# Allegro board ACU5EV.brd
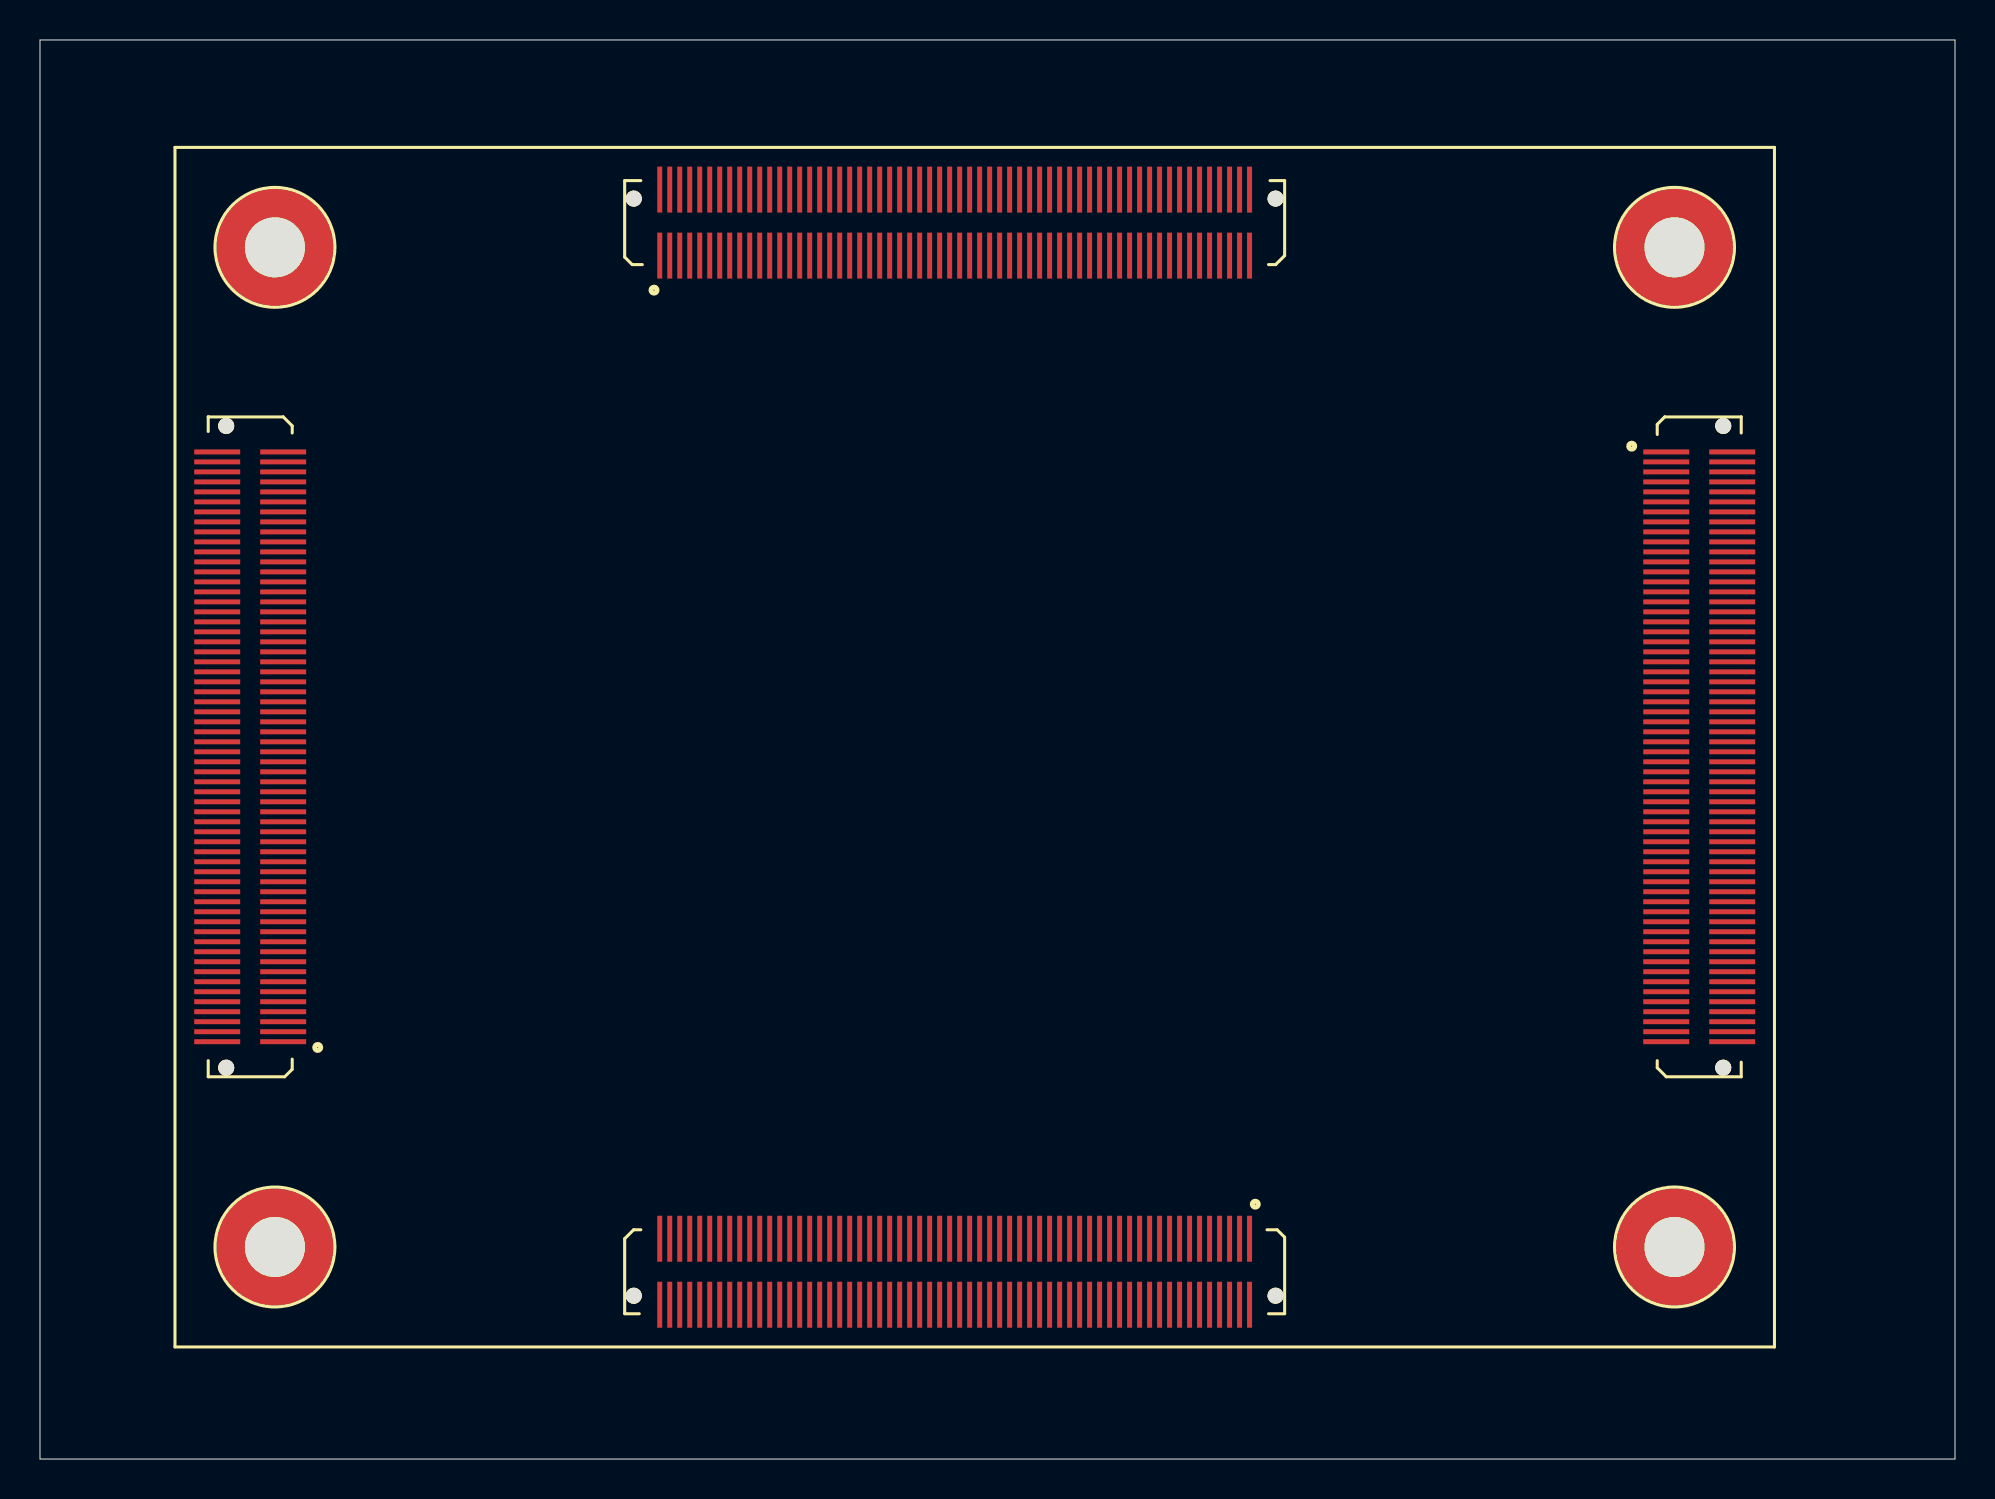
[diagram p0: board, top side]
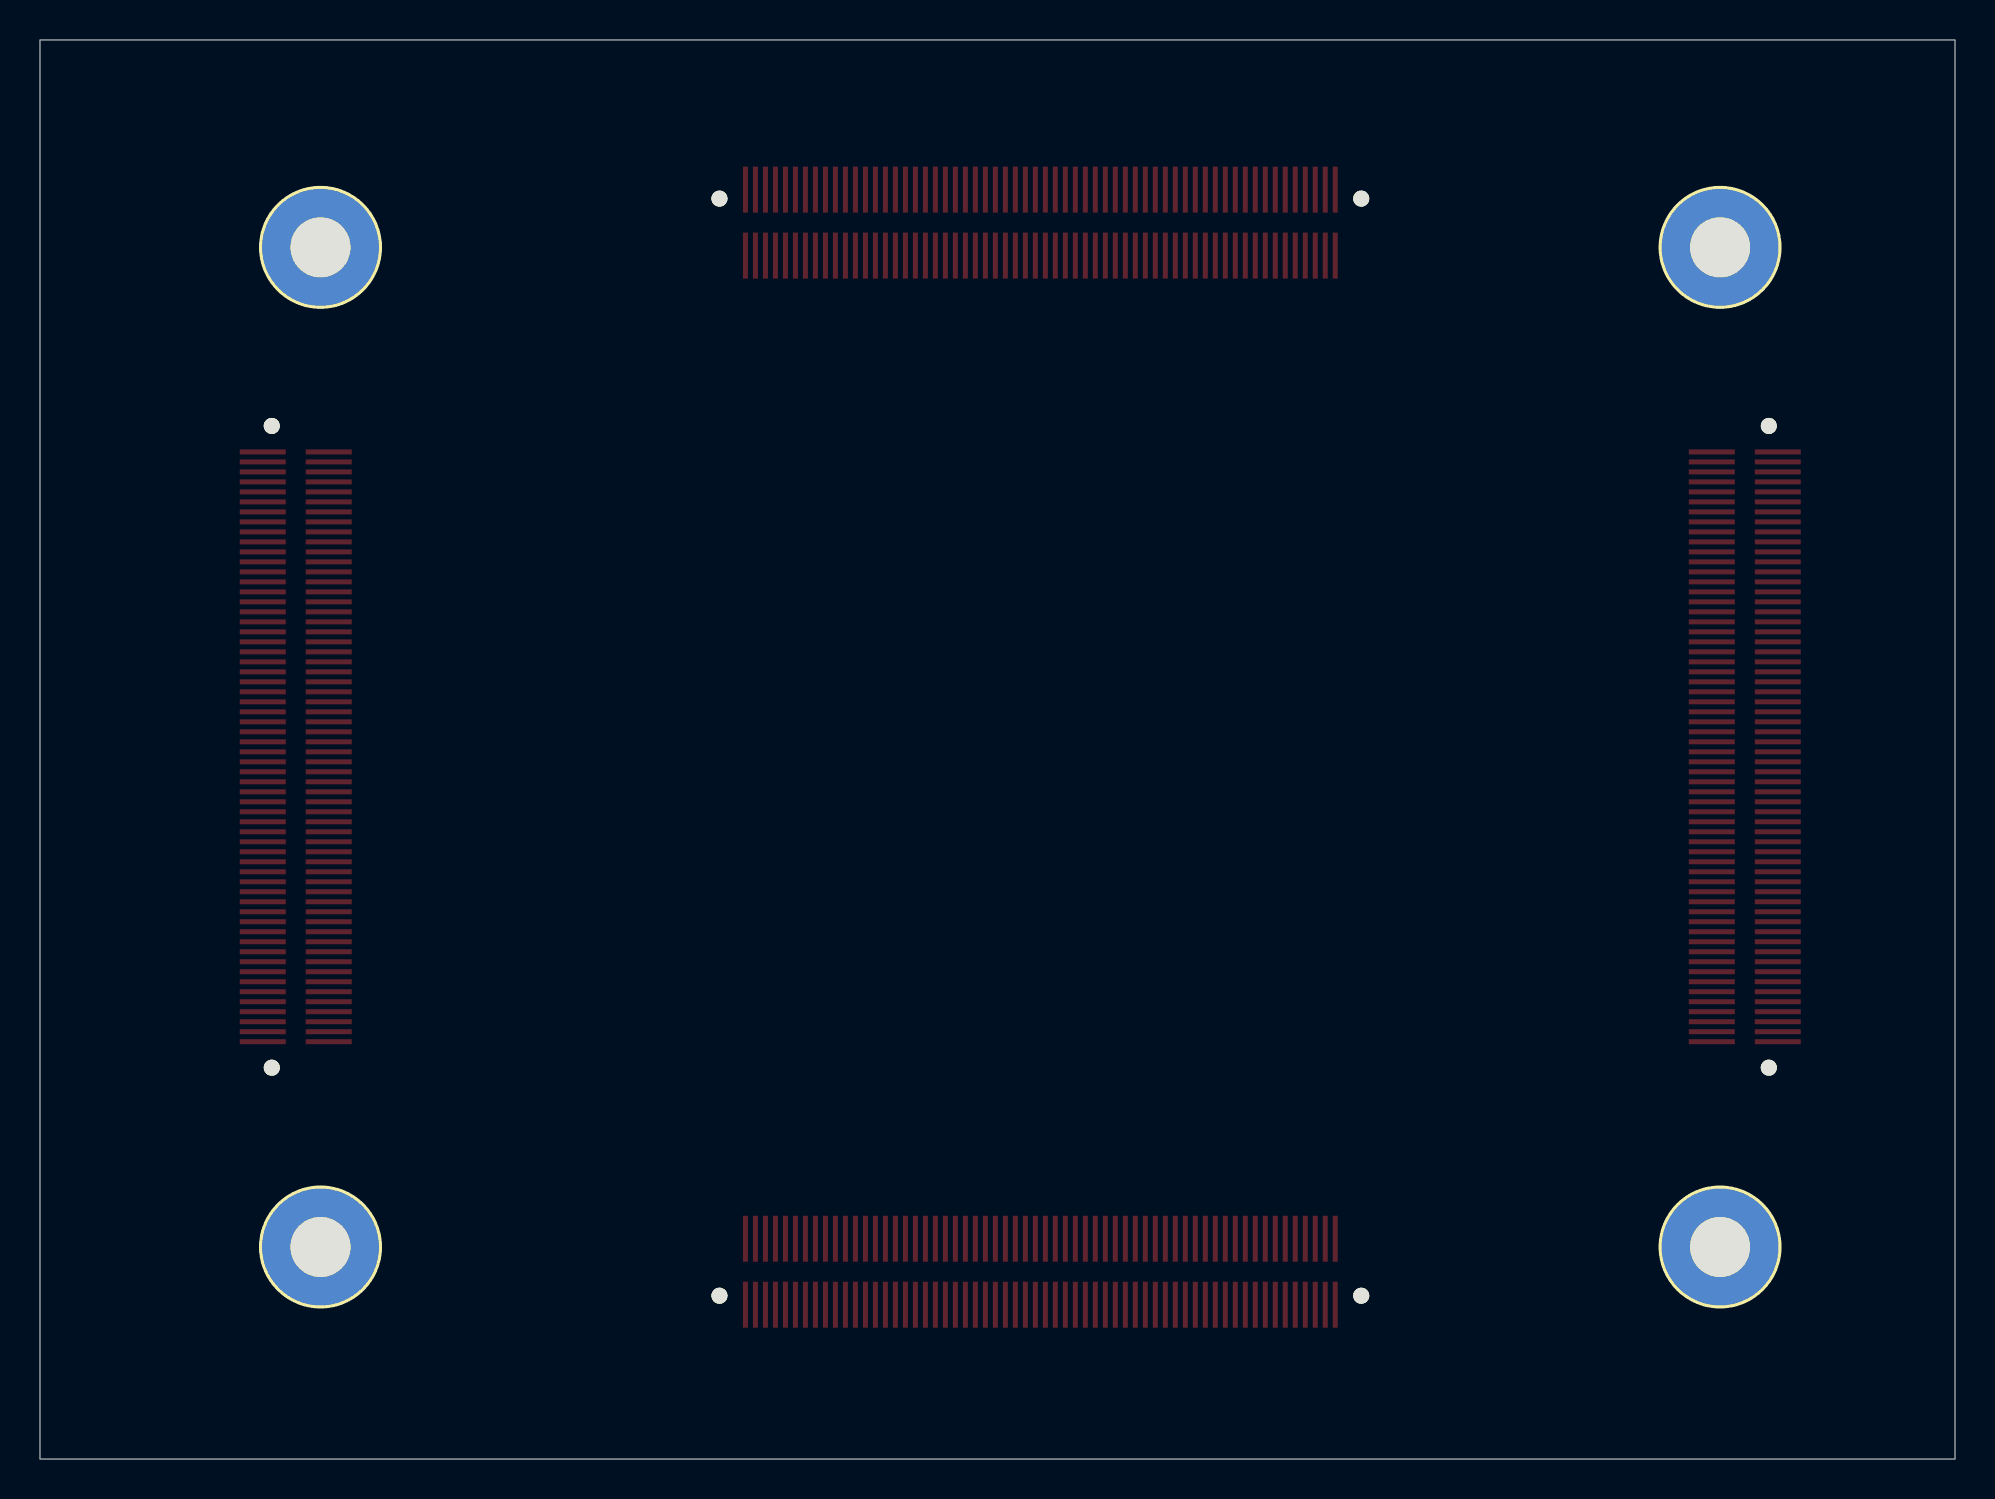
[diagram p1: board, bottom side, seen from below]

Outline 95.78 x 70.98 mm; copper layers: TOP, L2_GND, L3, L4_VCC, L5_GND, BOTTOM. Coordinates in mm from the lower left corner of the outline.
Outline path: 0,70.98 0,0 95.78,0 95.78,70.98 0,70.98

## Design rules (mm)
net group 90OHM: nets OTG_D_N OTG_D_P
net group 224_SFP_CLK: nets 224_CLK1_N 224_CLK1_P
net group 485_1: nets 485_A 485_B1
net group 485_2: nets 485_A2 485_B2
net group 505_CLK3: nets 505_CLK3_N 505_CLK3_P
net group 505_DP_CLK: nets 505_DP_CLKN 505_DP_CLKP
net group 505_PCIE_REFCLK: nets 505_PCIE_REFCLK_N 505_PCIE_REFCLK_P
net group 505_RX0: nets 505_RX2_N 505_RX2_P
net group B43_L2: nets B43_L2_N B43_L2_P
net group B43_L6: nets B43_L6_N B43_L6_P
net group B43_L7: nets B43_L7_N B43_L7_P
net group B43_L8: nets B43_L8_N B43_L8_P
net group B43_L10: nets B43_L10_N B43_L10_P
net group B43_L12: nets B43_L12_N B43_L12_P
net group B44_L1: nets B44_L1_N B44_L1_P
net group B44_L2: nets B44_L2_N B44_L2_P
net group B44_L3: nets B44_L3_N B44_L3_P
net group B44_L5: nets B44_L5_N B44_L5_P
net group B44_L6_DL: nets B44_L6_N B44_L6_P
net group B44_L7_DL: nets B44_L7_N B44_L7_P
net group B44_L8_DL: nets B44_L8_N B44_L8_P
net group B44_L9_DL: nets B44_L9_N B44_L9_P
net group B44_L10_DL: nets B44_L10_N B44_L10_P
net group B44_L11_DL: nets B44_L11_N B44_L11_P
net group B44_L12_DL: nets B44_L12_N B44_L12_P
net group B45_L4_DL: nets B45_L4_N B45_L4_P
net group B45_L5_DL: nets B45_L5_N B45_L5_P
net group B45_L6_DL: nets B45_L6_N B45_L6_P
net group B45_L9_DL: nets B45_L9_N B45_L9_P
net group B45_L11_DL: nets B45_L11_N B45_L11_P
net group B45_L12_DL: nets B45_L12_N B45_L12_P
net group B46_L1_DL: nets B46_L1_N B46_L1_P
net group B46_L2_DL: nets B46_L2_N B46_L2_P
net group B46_L3_DL: nets B46_L3_N B46_L3_P
net group B46_L4_DL: nets B46_L4_N B46_L4_P
net group B46_L5_DL: nets B46_L5_N B46_L5_P
net group B46_L6_DL: nets B46_L6_N B46_L6_P
net group B46_L7_DL: nets B46_L7_N B46_L7_P
net group B46_L9_DL: nets B46_L9_N B46_L9_P
net group B46_L10_DL: nets B46_L10_N B46_L10_P
net group B46_L11_DL: nets B46_L11_N B46_L11_P
net group B46_L12_DL: nets B46_L12_N B46_L12_P
net group B65_L5: nets B65_L5_N B65_L5_P
net group B65_L22: nets B65_L22_N B65_L22_P
net group B66_L9: nets B66_L9_N B66_L9_P
net group CAN1: nets CAN1_CANH CAN1_CANL
net group CAN2: nets CAN2_CANH CAN2_CANL
net group DPAUX_C_P: nets DPAUX_C_N DPAUX_C_P
net group DPAUX_P: nets DPAUX_N DPAUX_P
net group FMC_CLK0: nets B65_L11_N B65_L11_P
net group FMC_CLK1: nets B65_L14_N B65_L14_P
net group FMC_LA00_CC: nets B65_L12_N B65_L12_P
net group FMC_LA01_CC: nets B65_L13_N B65_L13_P
net group FMC_LA02: nets B65_L10_N B65_L10_P
net group FMC_LA05: nets B65_L6_N B65_L6_P
net group FMC_LA06: nets B65_L20_N B65_L20_P
net group FMC_LA07: nets B65_L15_N B65_L15_P
net group FMC_LA08: nets B65_L7_N B65_L7_P
net group FMC_LA09: nets B65_L9_N B65_L9_P
net group FMC_LA10: nets B65_L17_N B65_L17_P
net group FMC_LA12: nets B65_L16_N B65_L16_P
net group FMC_LA13: nets B65_L21_N B65_L21_P
net group FMC_LA14: nets B65_L19_N B65_L19_P
net group FMC_LA15: nets B65_L18_N B65_L18_P
net group FMC_LA16: nets B65_L23_N B65_L23_P
net group FMC_LA17_CC: nets B66_L11_N B66_L11_P
net group FMC_LA18_CC: nets B66_L12_N B66_L12_P
net group FMC_LA19: nets B65_L24_N B65_L24_P
net group FMC_LA20: nets B66_L5_N B66_L5_P
net group FMC_LA21: nets B66_L16_N B66_L16_P
net group FMC_LA22: nets B66_L3_N B66_L3_P
net group FMC_LA23: nets B65_L8_N B65_L8_P
net group FMC_LA24: nets B66_L2_N B66_L2_P
net group FMC_LA25: nets B66_L15_N B66_L15_P
net group FMC_LA26: nets B66_L6_N B66_L6_P
net group FMC_LA27: nets B66_L1_N B66_L1_P
net group FMC_LA28: nets B66_L7_N B66_L7_P
net group FMC_LA29: nets B66_L20_N B66_L20_P
net group FMC_LA30: nets B66_L13_N B66_L13_P
net group FMC_LA31: nets B66_L10_N B66_L10_P
net group PCIE_REFCLK_DL: nets PCIE_REFCLK_N PCIE_REFCLK_P
net group 20MIL: nets 224_RX0_N 224_RX0_P 224_RX1_N 224_RX1_P 224_RX2_N 224_RX2_P 224_RX3_N 224_RX3_P 224_TX0_N 224_TX0_P
net group 20MIL1: nets 224_CLK0_N 224_CLK0_P 224_TX1_N 224_TX1_P 224_TX2_N 224_TX2_P 224_TX3_N 224_TX3_P GT0_DP_TX_C_N GT0_DP_TX_C_P GT1_DP_TX_C_N GT1_DP_TX_C_P MIPI_CLK_N MIPI_CLK_P MIPI_LAN0_N MIPI_LAN0_P MIPI_LAN1_N MIPI_LAN1_P PCIE_TX_C_N PCIE_TX_C_P RXN_DS1 RXN_DS2 RXN_DS3 RXN_DS4 RXP_DS1 RXP_DS2 RXP_DS3 RXP_DS4 TXN_DS1 TXN_DS1_C TXN_DS2 TXN_DS3 TXN_DS3_C TXN_DS4 TXN_DS4_C TXP_DS1 TXP_DS1_C TXP_DS2 TXP_DS3 TXP_DS3_C TXP_DS4 TXP_DS4_C USB_RXN_UP USB_RXP_UP USB_TXN_UP USB_TXP_UP
net group 20MIL2: nets 505_USB_CLKN 505_USB_CLKP GT0_DP_TX_N GT0_DP_TX_P GT1_DP_TX_N GT1_DP_TX_P PCIE_RX_N PCIE_RX_P PCIE_TX_N PCIE_TX_P USB_DM0 USB_DP0 USB_SSRXN USB_SSRXP USB_SSTXN USB_SSTXP
net group ETH_RX: nets PHY1_RXCK PHY1_RXCTL PHY1_RXD0 PHY1_RXD1 PHY1_RXD2 PHY1_RXD3 PHY2_RXCK PHY2_RXCTL PHY2_RXD0 PHY2_RXD1 PHY2_RXD2 PHY2_RXD3
net group ETH_TX: nets PHY1_TXCK PHY1_TXCTL PHY1_TXD0 PHY1_TXD1 PHY1_TXD2 PHY1_TXD3 PHY2_TXCK PHY2_TXCTL PHY2_TXD0 PHY2_TXD1 PHY2_TXD2 PHY2_TXD3
net group OTG_DATA: nets USB_CLK USB_DATA0 USB_DATA1 USB_DATA2 USB_DATA3 USB_DATA4 USB_DATA5 USB_DATA6 USB_DATA7 USB_DIR USB_NXT USB_STP
net group PHY_MDI: nets PHY1_MDI0_N PHY1_MDI0_P PHY1_MDI1_N PHY1_MDI1_P PHY1_MDI2_N PHY1_MDI2_P PHY1_MDI3_N PHY1_MDI3_P PHY2_MDI0_N PHY2_MDI0_P PHY2_MDI1_N PHY2_MDI1_P PHY2_MDI2_N PHY2_MDI2_P PHY2_MDI3_N PHY2_MDI3_P
net group SD_D: nets SD_CLK SD_CMD SD_D0 SD_D1 SD_D2 SD_D3
net group USB: nets N16523963 N16524061 N23663238 N23663240
nets with their own width: min track width 0.254; nets +3.3V GND

## Placement (name value [footprint] x y rotation side)
J1  -  [AXK6A2337YG]  10.51 35.62 90 top
J2  -  [AXK6A2337YG]  45.75 61.84 0 top
J3  -  [AXK6A2337YG]  45.75 9.37 180 top
J4  -  [AXK6A2337YG]  82.99 35.62 270 top
NOREF  -  []  278.75 41.05 0 top
NOREF#2  -  [unnamed#2]  46.75 35.6 180 top

## Library data of the parts
J1-J4 = CONN SOCKET 60x2_0

## Footprints (pads in the part's own frame, mm; a bottom-side part is the same pattern mirrored in y, then rotated)
AXK6A2337YG
  round 0.8 hole 0.8 unplated: (-16.05,1.2) (16.05,1.2)
  rect 0.25x2.3 smd: 1(-14.75,-1.65) 2(-14.75,1.65) 3(-14.25,-1.65) 4(-14.25,1.65) 5(-13.75,-1.65) 6(-13.75,1.65) 7(-13.25,-1.65) 8(-13.25,1.65) 9(-12.75,-1.65) 10(-12.75,1.65) 11(-12.25,-1.65) 12(-12.25,1.65) 13(-11.75,-1.65) 14(-11.75,1.65) 15(-11.25,-1.65) 16(-11.25,1.65) 17(-10.75,-1.65) 18(-10.75,1.65) 19(-10.25,-1.65) 20(-10.25,1.65) 21(-9.75,-1.65) 22(-9.75,1.65) 23(-9.25,-1.65) 24(-9.25,1.65) 25(-8.75,-1.65) 26(-8.75,1.65) 27(-8.25,-1.65) 28(-8.25,1.65) 29(-7.75,-1.65) 30(-7.75,1.65) 31(-7.25,-1.65) 32(-7.25,1.65) 33(-6.75,-1.65) 34(-6.75,1.65) 35(-6.25,-1.65) 36(-6.25,1.65) 37(-5.75,-1.65) 38(-5.75,1.65) 39(-5.25,-1.65) 40(-5.25,1.65) 41(-4.75,-1.65) 42(-4.75,1.65) 43(-4.25,-1.65) 44(-4.25,1.65) 45(-3.75,-1.65) 46(-3.75,1.65) 47(-3.25,-1.65) 48(-3.25,1.65) 49(-2.75,-1.65) 50(-2.75,1.65) 51(-2.25,-1.65) 52(-2.25,1.65) 53(-1.75,-1.65) 54(-1.75,1.65) 55(-1.25,-1.65) 56(-1.25,1.65) 57(-0.75,-1.65) 58(-0.75,1.65) 59(-0.25,-1.65) 60(-0.25,1.65) 61(0.25,-1.65) 62(0.25,1.65) 63(0.75,-1.65) 64(0.75,1.65) 65(1.25,-1.65) 66(1.25,1.65) 67(1.75,-1.65) 68(1.75,1.65) 69(2.25,-1.65) 70(2.25,1.65) 71(2.75,-1.65) 72(2.75,1.65) 73(3.25,-1.65) 74(3.25,1.65) 75(3.75,-1.65) 76(3.75,1.65) 77(4.25,-1.65) 78(4.25,1.65) 79(4.75,-1.65) 80(4.75,1.65) 81(5.25,-1.65) 82(5.25,1.65) 83(5.75,-1.65) 84(5.75,1.65) 85(6.25,-1.65) 86(6.25,1.65) 87(6.75,-1.65) 88(6.75,1.65) 89(7.25,-1.65) 90(7.25,1.65) 91(7.75,-1.65) 92(7.75,1.65) 93(8.25,-1.65) 94(8.25,1.65) 95(8.75,-1.65) 96(8.75,1.65) 97(9.25,-1.65) 98(9.25,1.65) 99(9.75,-1.65) 100(9.75,1.65) 101(10.25,-1.65) 102(10.25,1.65) 103(10.75,-1.65) 104(10.75,1.65) 105(11.25,-1.65) 106(11.25,1.65) 107(11.75,-1.65) 108(11.75,1.65) 109(12.25,-1.65) 110(12.25,1.65) 111(12.75,-1.65) 112(12.75,1.65) 113(13.25,-1.65) 114(13.25,1.65) 115(13.75,-1.65) 116(13.75,1.65) 117(14.25,-1.65) 118(14.25,1.65) 119(14.75,-1.65) 120(14.75,1.65)
unnamed#2
  round 6 hole 3: 1(-35,25) 2(35,25) 3(-35,-25) 4(35,-25)

## Nets
+1.8V: J4.100(110) J4.102(111) J4.104(112)
+12V: J4.107(54) J4.108(114) J4.109(55) J4.110(115) J4.111(56) J4.112(116) J4.113(57) J4.114(117) J4.115(58) J4.116(118) J4.117(59) J4.118(119) J4.119(60) J4.120
GND: J1.5(3) J1.6(63) J1.11(6) J1.12(66) J1.17(9) J1.18(69) J1.23(12) J1.24(72) J1.29(15) J1.30(75) J1.35(18) J1.36(78) J1.41(21) J1.42(81) J1.47(24) J1.48(84) J1.53(27) J1.54(87) J1.59(30) J1.60(90) J1.65(33) J1.66(93) J1.71(36) J1.72(96) J1.77(39) J1.78(99) J1.83(42) J1.84(102) J1.89(45) J1.90(105) J1.95(48) J1.96(108) J1.101(51) J1.102(111) J1.107(54) J1.108(114) J1.113(57) J1.114(117) J1.119(60) J1.120 J2.5(3) J2.6(63) J2.11(6) J2.12(66) J2.17(9) J2.18(69) J2.23(12) J2.24(72) J2.29(15) J2.30(75) J2.35(18) J2.36(78) J2.41(21) J2.42(81) J2.47(24) J2.48(84) J2.53(27) J2.54(87) J2.59(30) J2.60(90) J2.65(33) J2.66(93) J2.71(36) J2.72(96) J2.77(39) J2.78(99) J2.83(42) J2.84(102) J2.89(45) J2.90(105) J2.95(48) J2.96(108) J2.101(51) J2.102(111) J2.107(54) J2.108(114) J2.113(57) J2.114(117) J2.119(60) J2.120 J3.5(3) J3.6(63) J3.11(6) J3.12(66) J3.17(9) J3.18(69) J3.23(12) J3.24(72) J3.29(15) J3.30(75) J3.35(18) J3.36(78) J3.41(21) J3.42(81) J3.47(24) J3.48(84) J3.53(27) J3.54(87) J3.59(30) J3.60(90) J3.65(33) J3.66(93) J3.71(36) J3.72(96) J3.77(39) J3.78(99) J3.83(42) J3.84(102) J3.89(45) J3.90(105) J3.95(48) J3.96(108) J3.101(51) J3.102(111) J3.107(54) J3.108(114) J3.113(57) J3.114(117) J3.119(60) J3.120 J4.5(3) J4.6(63) J4.11(6) J4.12(66) J4.17(9) J4.18(69) J4.23(12) J4.24(72) J4.29(15) J4.30(75) J4.35(18) J4.36(78) J4.41(21) J4.42(81) J4.47(24) J4.48(84) J4.53(27) J4.54(87) J4.59(30) J4.60(90) J4.65(33) J4.66(93) J4.71(36) J4.72(96) J4.77(39) J4.78(99) J4.83(42) J4.84(102) J4.89(45) J4.90(105) J4.95(48) J4.96(108) J4.105(53) J4.106(113)
VBAT_IN: J3.73(37)
VCCO_65: J4.99(50) J4.101(51) J4.103(52)
224_CLK0_N: J3.93(47)
224_CLK0_P: J3.91(46)
224_CLK1_N: J3.94(107)
224_CLK1_P: J3.92(106)
224_RX0_N: J3.116(118)
224_RX0_P: J3.118(119)
224_RX1_N: J3.110(115)
224_RX1_P: J3.112(116)
224_RX2_N: J3.104(112)
224_RX2_P: J3.106(113)
224_RX3_N: J3.98(109)
224_RX3_P: J3.100(110)
224_TX0_N: J3.115(58)
224_TX0_P: J3.117(59)
224_TX1_N: J3.109(55)
224_TX1_P: J3.111(56)
224_TX2_N: J3.103(52)
224_TX2_P: J3.105(53)
224_TX3_N: J3.97(49)
224_TX3_P: J3.99(50)
505_CLK3_N: J2.94(107)
505_CLK3_P: J2.92(106)
505_DP_CLKN: J2.87(44)
505_DP_CLKP: J2.85(43)
505_PCIE_REFCLK_N: J2.93(47)
505_PCIE_REFCLK_P: J2.91(46)
505_RX2_N: J2.118(119)
505_RX2_P: J2.116(118)
505_RX3_N: J2.106(113)
505_RX3_P: J2.104(112)
505_USB_CLKN: J2.88(104)
505_USB_CLKP: J2.86(103)
B43_L2_N: J3.67(34)
B43_L2_P: J3.69(35)
B43_L6_N: J3.10(65)
B43_L6_P: J3.8(64)
B43_L7_N: J3.16(68)
B43_L7_P: J3.14(67)
B43_L8_N: J3.20(70)
B43_L8_P: J3.22(71)
B43_L9_N: J3.40(80)
B43_L10_N: J3.43(22)
B43_L10_P: J3.45(23)
B43_L12_N: J3.37(19)
B43_L12_P: J3.39(20)
B44_L1_N: J3.21(11)
B44_L1_P: J3.19(10)
B44_L2_N: J3.28(74)
B44_L2_P: J3.26(73)
B44_L3_N: J3.33(17)
B44_L3_P: J3.31(16)
B44_L5_N: J3.15(8)
B44_L5_P: J3.13(7)
B44_L6_N: J3.9(5)
B44_L6_P: J3.7(4)
B44_L7_N: J3.4(62)
B44_L7_P: J3.2(61)
B44_L8_N: J3.63(32)
B44_L8_P: J3.61(31)
B44_L9_N: J3.55(28)
B44_L9_P: J3.57(29)
B44_L10_N: J3.3(2)
B44_L10_P: J3.1
B44_L11_N: J3.49(25)
B44_L11_P: J3.51(26)
B44_L12_N: J3.27(14)
B44_L12_P: J3.25(13)
B45_L4_N: J2.43(22)
B45_L4_P: J2.45(23)
B45_L5_N: J2.31(16)
B45_L5_P: J2.33(17)
B45_L6_N: J2.50(85)
B45_L6_P: J2.52(86)
B45_L9_N: J2.28(74)
B45_L9_P: J2.26(73)
B45_L11_N: J2.46(83)
B45_L11_P: J2.44(82)
B45_L12_N: J2.40(80)
B45_L12_P: J2.38(79)
B46_L1_N: J2.81(41)
B46_L1_P: J2.79(40)
B46_L2_N: J2.68(94)
B46_L2_P: J2.70(95)
B46_L3_N: J2.62(91)
B46_L3_P: J2.64(92)
B46_L4_N: J2.74(97)
B46_L4_P: J2.76(98)
B46_L5_N: J2.73(37)
B46_L5_P: J2.75(38)
B46_L6_N: J2.56(88)
B46_L6_P: J2.58(89)
B46_L7_N: J2.61(31)
B46_L7_P: J2.63(32)
B46_L9_N: J2.67(34)
B46_L9_P: J2.69(35)
B46_L10_N: J2.55(28)
B46_L10_P: J2.57(29)
B46_L11_N: J2.51(26)
B46_L11_P: J2.49(25)
B46_L12_N: J2.82(101)
B46_L12_P: J2.80(100)
B65_L4_N: J1.7(4)
B65_L4_P: J1.9(5)
B65_L5_N: J1.43(22)
B65_L5_P: J1.45(23)
B65_L6_N: J1.14(67)
B65_L6_P: J1.16(68)
B65_L7_N: J1.21(11)
B65_L7_P: J1.19(10)
B65_L8_N: J1.52(86)
B65_L8_P: J1.50(85)
B65_L9_N: J1.28(74)
B65_L9_P: J1.26(73)
B65_L10_N: J1.55(28)
B65_L10_P: J1.57(29)
B65_L11_N: J1.49(25)
B65_L11_P: J1.51(26)
B65_L12_N: J1.64(92)
B65_L12_P: J1.62(91)
B65_L13_N: J1.68(94)
B65_L13_P: J1.70(95)
B65_L14_N: J1.39(20)
B65_L14_P: J1.37(19)
B65_L15_N: J1.27(14)
B65_L15_P: J1.25(13)
B65_L16_N: J1.33(17)
B65_L16_P: J1.31(16)
B65_L17_N: J1.22(71)
B65_L17_P: J1.20(70)
B65_L18_N: J1.46(83)
B65_L18_P: J1.44(82)
B65_L19_N: J1.40(80)
B65_L19_P: J1.38(79)
B65_L20_N: J1.10(65)
B65_L20_P: J1.8(64)
B65_L21_N: J1.76(98)
B65_L21_P: J1.74(97)
B65_L22_N: J1.4(62)
B65_L22_P: J1.2(61)
B65_L23_N: J1.82(101)
B65_L23_P: J1.80(100)
B65_L24_N: J1.56(88)
B65_L24_P: J1.58(89)
B66_L1_N: J1.69(35)
B66_L1_P: J1.67(34)
B66_L2_N: J1.94(107)
B66_L2_P: J1.92(106)
B66_L3_N: J1.63(32)
B66_L3_P: J1.61(31)
B66_L4_N: J1.93(47)
B66_L4_P: J1.91(46)
B66_L5_N: J1.86(103)
B66_L5_P: J1.88(104)
B66_L6_N: J1.75(38)
B66_L6_P: J1.73(37)
B66_L7_N: J1.106(113)
B66_L7_P: J1.104(112)
B66_L8_N: J1.115(58)
B66_L8_P: J1.117(59)
B66_L9_N: J1.118(119)
B66_L9_P: J1.116(118)
B66_L10_N: J1.112(116)
B66_L10_P: J1.110(115)
B66_L11_N: J1.99(50)
B66_L11_P: J1.97(49)
B66_L12_N: J1.105(53)
B66_L12_P: J1.103(52)
B66_L13_N: J1.109(55)
B66_L13_P: J1.111(56)
B66_L15_N: J1.87(44)
B66_L15_P: J1.85(43)
B66_L16_N: J1.81(41)
B66_L16_P: J1.79(40)
B66_L17_N: J2.22(71)
B66_L20_N: J1.100(110)
B66_L20_P: J1.98(109)
CAM_CLK: J3.70(95)
CAM_GPIO: J3.68(94)
CAM_SCL: J3.74(97)
CAM_SDA: J3.76(98)
FAN_PWM: J3.38(79)
FPGA_TCK: J2.4(62)
FPGA_TDI: J2.2(61)
FPGA_TDO: J2.8(64)
FPGA_TMS: J2.10(65)
GT0_DP_TX_N: J2.100(110)
GT0_DP_TX_P: J2.98(109)
GT1_DP_TX_N: J2.112(116)
GT1_DP_TX_P: J2.110(115)
MIO27_DP_AUX_OUT: J4.28(74)
MIO28_DP_HPD: J4.32(76)
MIO29_DP_OE: J4.3(2)
MIO30_DP_AUX_IN: J4.2(61)
MIPI_CLK_N: J1.13(7)
MIPI_CLK_P: J1.15(8)
MIPI_LAN0_N: J1.1
MIPI_LAN0_P: J1.3(2)
MIPI_LAN1_N: J1.32(76)
MIPI_LAN1_P: J1.34(77)
MR: J3.75(38)
PCIE_RSTN_MIO37: J4.27(14)
PCIE_RX_N: J2.105(53)
PCIE_RX_P: J2.103(52)
PCIE_TX_N: J2.99(50)
PCIE_TX_P: J2.97(49)
PHY1_MDC: J4.37(19)
PHY1_MDIO: J4.33(17)
PHY1_RXCK: J4.82(101)
PHY1_RXCTL: J4.80(100)
PHY1_RXD0: J4.76(98)
PHY1_RXD1: J4.74(97)
PHY1_RXD2: J4.70(95)
PHY1_RXD3: J4.68(94)
PHY1_TXCK: J4.62(91)
PHY1_TXCTL: J4.64(92)
PHY1_TXD0: J4.50(85)
PHY1_TXD1: J4.52(86)
PHY1_TXD2: J4.56(88)
PHY1_TXD3: J4.58(89)
PHY2_MDC: J2.14(67)
PHY2_MDIO: J2.7(4)
PHY2_RESET: J2.3(2)
PHY2_RXCK: J2.1
PHY2_RXCTL: J2.9(5)
PHY2_RXD0: J2.13(7)
PHY2_RXD1: J2.15(8)
PHY2_RXD2: J2.20(70)
PHY2_RXD3: J2.19(10)
PHY2_TXCK: J2.16(68)
PHY2_TXCTL: J2.21(11)
PHY2_TXD0: J2.39(20)
PHY2_TXD1: J2.37(19)
PHY2_TXD2: J2.27(14)
PHY2_TXD3: J2.25(13)
PL_485_DE1: J2.32(76)
PL_485_DE2: J2.34(77)
PL_485_RXD1: J3.56(88)
PL_485_RXD2: J3.58(89)
PL_485_TXD1: J3.50(85)
PL_485_TXD2: J3.52(86)
PL_KEY1: J3.64(92)
PL_LED1: J3.62(91)
PL_UART_RX: J3.46(83)
PL_UART_TX: J3.44(82)
PS_CAN1_RX: J4.94(107)
PS_CAN1_TX: J4.69(35)
PS_CAN2_RX: J4.45(23)
PS_CAN2_TX: J4.43(22)
PS_IIC1_SCL: J4.87(44)
PS_IIC1_SDA: J4.91(46)
PS_KEY1: J4.85(43)
PS_LED1: J4.51(26)
PS_MIO34_SCL: J4.81(41)
PS_MIO35_SDA: J4.1
PS_MIO36: J4.25(13)
PS_MIO41: J4.67(34)
PS_MIO44: J4.55(28)
PS_MODE0: J4.13(7)
PS_MODE1: J4.15(8)
PS_MODE2: J4.19(10)
PS_MODE3: J4.21(11)
PS_POR_B: J3.80(100)
PS_UART0_RX: J4.92(106)
PS_UART0_TX: J4.86(103)
SD_CD: J4.57(29)
SD_CLK: J4.88(104)
SD_CMD: J4.75(38)
SD_D0: J4.73(37)
SD_D1: J4.61(31)
SD_D2: J4.63(32)
SD_D3: J4.79(40)
USB_CLK: J4.14(67)
USB_DATA0: J4.20(70)
USB_DATA1: J4.22(71)
USB_DATA2: J4.26(73)
USB_DATA3: J4.34(77)
USB_DATA4: J4.38(79)
USB_DATA5: J4.40(80)
USB_DATA6: J4.44(82)
USB_DATA7: J4.46(83)
USB_DIR: J4.10(65)
USB_NXT: J4.16(68)
USB_RESET_N: J4.4(62)
USB_SSRXN: J2.117(59)
USB_SSRXP: J2.115(58)
USB_SSTXN: J2.111(56)
USB_SSTXP: J2.109(55)
USB_STP: J4.8(64)

Pads without a net: J3 32 34 79 81 82 85 86 87 88; J4 7 9 31 39 49 93 97 98; NOREF#2 1 2 3 4

## Text on the board
User.12: L1 | L2 | L3 | L4 | L5 | L6 | (GND) | (VCC) | SINGLE ENDED | 50ohm | WIDTH | 4.5mil | 4mil | (WIDTH/SPACE) | 3.5mil/6mil | DIFF-PAIR | 4mil/7mil | 100ohm | 4.5mil/5mil | 90ohm | 10.CONTROLLED IMPENDANCE 50 OHM +/-10% | 6.TOLERANCE: HOLES DIAMETER {NPTH} +/-0.003" | 7.LINE WIDTH/SPACING: +/-20% | 8.ALL VIAS ARE TENTED | 9.CONTROLLED DIFFERENTAIL IMPEDANCE 100 OHM +/-10% | {EDGE TO EDGE/CENTRE TO EDGE} +/-0.005" | LINE WITH IMPEDANCE CHART FOR REFERENCE | HOLES {CENTRE TO CENTRE} +/-0.003" | OUTLINE {DATUM TO HOLES} +/-0.003" | {DATUM TO EDGE} +/-0.005" | LAYER 1      L1 TOP | LAYER 2      L2 GND | LAYER 3      L3 INNER | LAYER 4      L4 VCC | LAYER 5      L5 GND | LAYER 6      L6 BOTTOM | GOLD 0.05um MINIMUM | TOP SIDE | {PTH} +/-0.003" | 0.333oz | 1oz | -
User.45: FIGURE | SIZE | 8.0 | 10.0 | 19.69 | 27.56 | 35.0 | 36.0 | 40.0 | 43.31 | 51.18 | 70.87 | 118.11 | 125.0 | 31.5 | 43.0 | 53.15 | 63.0 | 129.92 | 59.06x47.24 | 74.8x31.5 | 78.74x27.56 | 90.55x59.06 | 102.36x31.5 | DRILL CHART: TOP to BOTTOM | ALL UNITS ARE IN MILS | TOLERANCE | +3.0/-3.0 | +0.0/-0.0 | PLATED | NON-PLATED | QTY | 1409 | 2 | 10 | 36 | 80 | 20 | 8 | 4 | 3 | 1
